# Altium PCB PCB.PcbDoc
Units mil, origin at the board's own origin, x right, y up, seen from the top; angles counter-clockwise.
Board outline 3937.01 x 3937.01 mil, 2 copper layers (Top Layer, Bottom Layer); 92 components, 63 nets, 363 pads, 53 vias.
Unrouted connection lines stored in the file: 291.
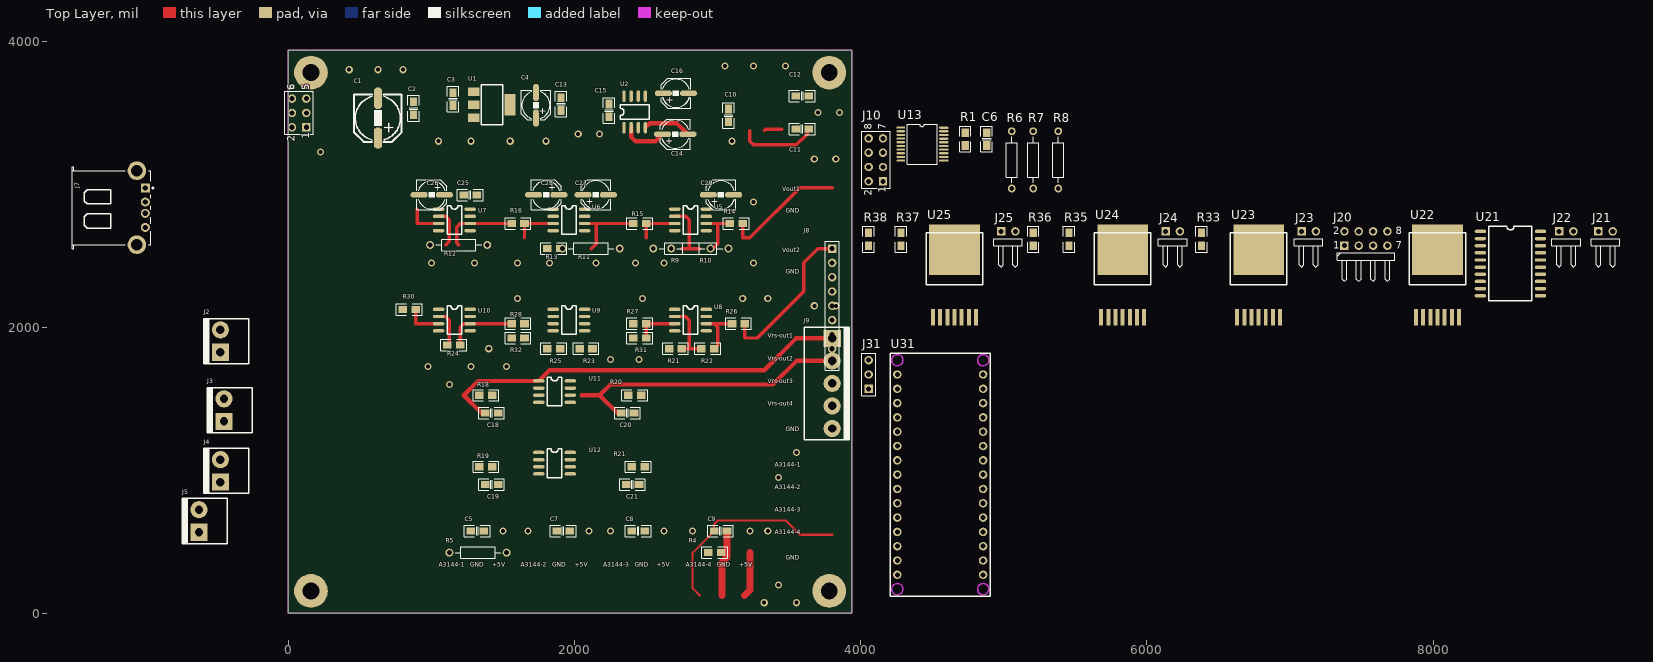
[diagram p0: Top Layer view]
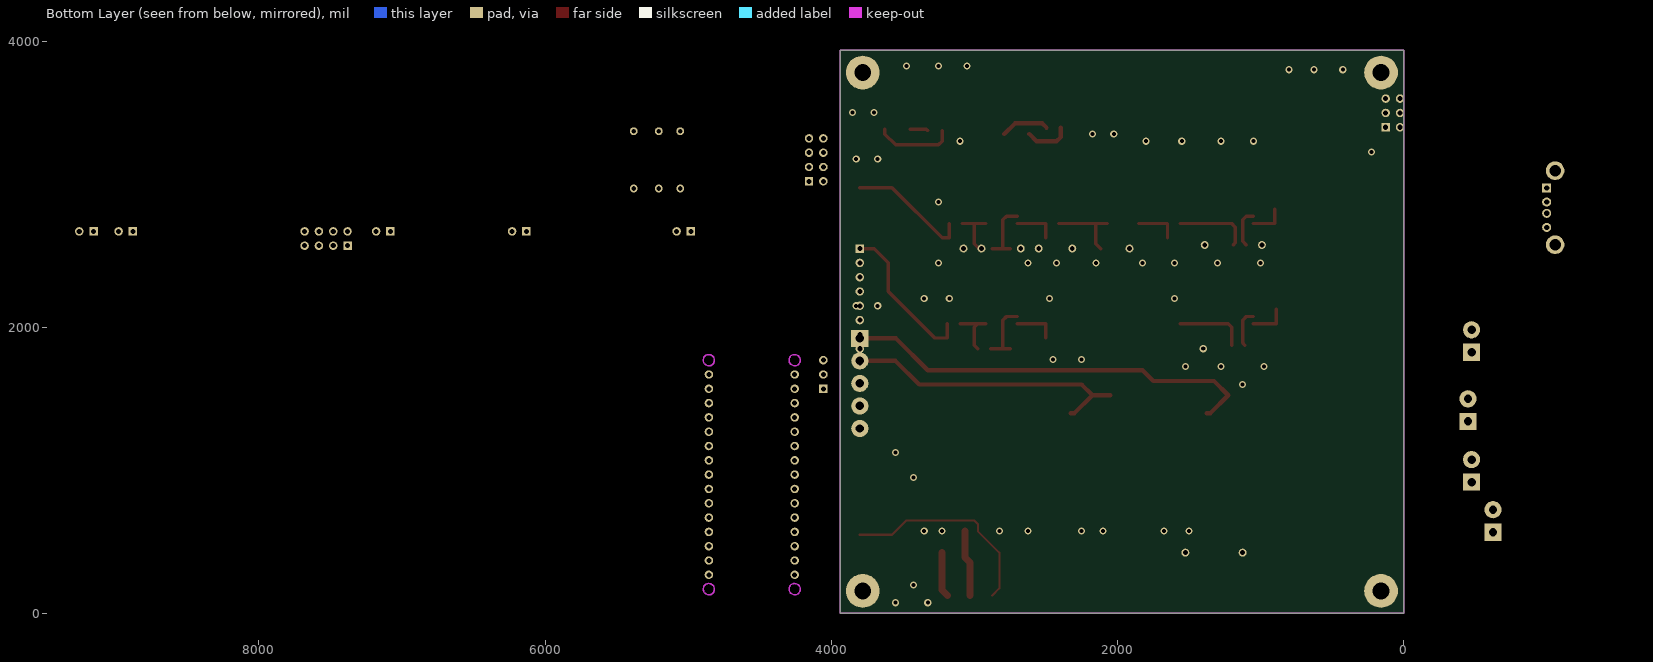
[diagram p1: Bottom Layer view, seen from below]

## Layer stack, top to bottom
Top Solder: solder mask 0.4, Solder Resist, Dk 3.5
Top Layer: signal copper 1.4
Dielectric 1: dielectric 12.6, FR-4, Dk 4.8
Bottom Layer: signal copper 1.4
Bottom Solder: solder mask 0.4, Solder Resist, Dk 3.5

## Board outline
0,0 0,3937.01 3937.01,3937.01 3937.01,0

## Design rules (kind name [scope] priority, off if disabled: settings)
Clearance [All] p1: gap=10
HoleSize [All] p1: absolutevalues=TRUE maxlimit=314.96 minlimit=1 maxpercent=80.000 minpercent=20.000
PlaneConnect [All] p1: planeconnectstyle=Direct reliefexpansion=20 reliefentries=4 reliefconductorwidth=10 reliefairgap=10
PolygonConnect [All] p1: connectstyle=Direct reliefconductorwidth=10 reliefentries=4 polygonreliefangle="90 Angle" airgapwidth=10
RoutingVias [All] p1: holewidth=28 width=50 viastyle="Through Hole" minholewidth=28 minwidth=50 maxholewidth=28 maxwidth=50
SolderMaskExpansion [All] p1: expansion=4
Width [All] p1: maxlimit=100 minlimit=10 preferedwidth=30
28 further rules are at their usual default settings.

## Classes and differential pairs
component class BTS7960: C25 C26 C27 C28 C29 J20 J21 J22 J23 J24 J25 R21 R22 R23 R24 R25 R26 R27 R28 R30 R31 R32 R33 R35 R36 R37 R38 U21 U22 U23 U24 U25
component class "Arduino Nano": J31 U31
component class 电原理图: *? C1 C2 C3 C4 C5 C6 C7 C8 C9 C10 C11 C12 C13 C14 C15 C16 C17 C18 C19 C20 C21 C22 C23 C24 C25 C26 C27 C28 C29 J1 J2 J3 J4 J5 J7 J8 J9 J10 MCP6002 MCP? R1 R4 R5 R6 R7 R8 R9 R10 R11 R12 R13 R14 R15 R16 R17 R18 R19 R20 R21 R22 R23 R24 R25 R27 R28 R29 R30 R31 R32 U1 U2 U3 U4 U5 U6 U7 U8 U9 U10 U11 U12 U13

## Components (designator, comment, footprint, x,y, rotation, side; value= is the part's Value field where it differs from the comment)
C1 "CD-25V-220uF-F8(SMD)" SMD-EC-F8 625,3322.41 r90 top
C2 "0805-50V-0.1uF" CC0805 875,3485 r90 top
C3 "0805-50V-0.1uF" CC0805 1150,3550 r90 top
C4 "CD-50V-10uF-F5(SMD)" SMD-EC-F5 1730,3453.75 r90 top
C5 "0805-50V-0.1uF" CC0805 1275,575 r0 top
C6 "0805-50V-0.1uF" CC0805 4880,3270 r90 top
C7 "0805-50V-0.1uF" CC0805 1875,575 r0 top
C8 "0805-50V-0.1uF" CC0805 2400,575 r0 top
C9 "0805-50V-0.1uF" CC0805 2975,575 r0 top
C10 "0805-50V-0.1uF" CC0805 3075,3435 r90 top
C11 "0805-50V-0.1uF" CC0805 3635,3385 r180 top
C12 "0805-50V-0.1uF" CC0805 3636.25,3615 r180 top
C13 "0805-50V-0.1uF" CC0805 1905,3605 r270 top
C14 "CD-50V-10uF-F5(SMD)" SMD-EC-F5 2605,3350 r0 top
C15 "0805-50V-0.1uF" CC0805 2240,3470 r90 top
C16 "CD-50V-10uF-F5(SMD)" SMD-EC-F5 2610,3635 r0 top
C18 "0805-50V-47pF" CC0805 1465,1400 r180 top
C19 "0805-50V-47pF" CC0805 1465,900 r180 top
C20 "0805-50V-47pF" CC0805 2325,1400 r0 top
C21 "0805-50V-47pF" CC0805 2360,900 r0 top
C25 "0805-0.1UF" CC0805 1225,2925 r0 top
C26 "50V-100UF" SMD-EC-F5 1100,2925 r180 top
C27 "50V-100UF" SMD-EC-F5 2050,2925 r0 top
C28 "50V-100UF" SMD-EC-F5 1900,2925 r180 top
C29 "50V-100UF" SMD-EC-F5 2925,2925 r0 top
J1 "Header 3X2" HDR2X3 124.98,3397.71 r90 top
J2 "VH3.96-2P" VH3.96-2P -475,1825 r90 top
J3 "VH3.96-2P" VH3.96-2P -450.02,1342.71 r90 top
J4 "VH3.96-2P" VH3.96-2P -475.02,917.71 r90 top
J5 "VH3.96-2P" VH3.96-2P -625.02,567.71 r90 top
J7 "USB TypeB" "USB TypeA 平插" -1056.81,3096.63 r180 top
J8 "Header 9" HDR1X9 3800.02,2549.81 r270 top
J9 "Header 5" VH3.96-5P 3800,1922.44 r270 top
J10 "Header 4X2" HDR2X4 4155,3020 r90 top
J20 "Header 4X2H" HDR2X4H 7380,2570 r0 top
J21 "Header 2H" HDR1X2H 9155,2670 r0 top
J22 "Header 2H" HDR1X2H 8880,2670 r0 top
J23 "Header 2H" HDR1X2H 7080,2670 r0 top
J24 "Header 2H" HDR1X2H 6130,2670 r0 top
J25 "Header 2H" HDR1X2H 4980,2670 r0 top
J31 "Header 3" HDR1X3 4055,1570 r90 top
R1 "Res2" 0805 4730,3270 r90 top
R4 "Res2" 0805 3025,425 r180 top
R5 "Res2" AXIAL-0.4 1325,425 r180 top
R6 "Res2" AXIAL-0.4 5055,3170 r90 top
R7 "Res2" AXIAL-0.4 5205,3170 r90 top
R8 "Res2" AXIAL-0.4 5380,3170 r90 top
R9 "Res2" AXIAL-0.4 2750,2550 r180 top
R10 "Res2" AXIAL-0.4 2875,2550 r0 top
R11 "Res2" AXIAL-0.4 2115,2550 r180 top
R12 "Res2" AXIAL-0.4 1190,2575 r180 top
R13 "Res2" 0805 1900,2550 r180 top
R14 "Res2" 0805 3085,2725 r0 top
R15 "Res2" 0805 2500,2725 r180 top
R16 "Res2" 0805 1650,2725 r180 top
R18 "Res2" 0805 1425,1525 r180 top
R19 "Res2" 0805 1425,1025 r180 top
R20 "Res2" 0805 2375,1525 r0 top
R21 "Res2" 0805 2750,1850 r180 top
R21 "Res2" 0805 2400,1025 r0 top
R22 "Res2" 0805 2885,1850 r0 top
R23 "Res2" 0805 2125,1850 r180 top
R24 "Res2" 0805 1200,1875 r180 top
R25 "Res2" 0805 1900,1850 r180 top
R26 "Res2" 0805 3100,2025 r0 top
R27 "Res2" 0805 2500,2025 r180 top
R28 "Res2" 0805 1650,2025 r180 top
R30 "Res2" 0805 890,2125 r180 top
R31 "Res2" 0805 2500,1925 r180 top
R32 "Res2" 0805 1650,1925 r180 top
R33 "Res2" 0805 6380,2570 r90 top
R35 "Res2" 0805 5455,2570 r90 top
R36 "Res2" 0805 5205,2570 r90 top
R37 "Res2" 0805 4280,2570 r90 top
R38 "Res2" 0805 4055,2570 r90 top
U1 "LM1117-1.5" SOT223 1295,3645 r270 top
U2 "max860" SO-8 2345,3395 r90 top
U5 "A3144" SO-8 2700,2825 r0 top
U6 "A3144" SO-8 1850,2825 r0 top
U7 "A3144" SO-8 1050,2825 r0 top
U8 "A3144" SO-8 2700,2125 r0 top
U9 "A3144" SO-8 1850,2125 r0 top
U10 "A3144" SO-8 1050,2125 r0 top
U11 "MCP6002" SO-8 1750,1625 r0 top
U12 "MCP6002" SO-8 1750,1125 r0 top
U13 "PCA9544" SSOP20 4280,3395 r0 top
U21 "SN74AHC244DW" SOP-20 8330,2670 r0 top
U22 "BTN7970" BTN7970 7880,2070 r0 top
U23 "BTN7970" BTN7970 6630,2070 r0 top
U24 "BTN7970" BTN7970 5680,2070 r0 top
U25 "BTN7970" BTN7970 4505,2070 r0 top
U31 "Arduino Nano BLE" "Arduino Nano" 4255,1670 r0 top

## Footprints (in the part's own frame and the unit in brackets; to place one, negate y for a bottom-side part, rotate by r counter-clockwise, add the part's x,y. Pads: shape width x height; smd on the part's side, far side on the other; paste and mask are expansions set on the pad)
0805 [mil]
  rect 60x50 smd: 1(0,0) 2(90,0)
  silkscreen extent -45,-40 135,40
"Arduino Nano" [mm]
  round 1.5 hole 0.9: 1(0,0) 2(0,-2.54) 3(0,-5.08) 4(0,-7.62) 5(0,-10.16) 6(0,-12.7) 7(0,-15.24) 8(0,-17.78) 9(0,-20.32) 10(0,-22.86) 11(0,-25.4) 12(0,-27.94) 13(0,-30.48) 14(0,-33.02) 15(0,-35.56) 16(15.24,-35.56) 17(15.24,-33.02) 18(15.24,-30.48) 19\(15.24,-27.94) 20(15.24,-25.4) 21(15.24,-22.86) 22(15.24,-20.32) 23(15.24,-17.78) 24(15.24,-15.24) 25(15.24,-12.7) 26(15.24,-10.16) 27(15.24,-7.62) 28(15.24,-5.08) 29(15.24,-2.54) 30(15.24,0)
  Keep-Out Layer circle w0.254: c15.24,2.54 r1
  Keep-Out Layer circle w0.254: c0,2.54 r1
  Keep-Out Layer circle w0.254: c15.24,-38.1 r1
  Keep-Out Layer circle w0.254: c0,-38.1 r1
  silkscreen extent -1.27,-39.37 16.51,3.81
AXIAL-0.4 [mm] "Axial Device, Thru-Hole; 2 Leads; 0.4 in Pin Spacing"
  round 1.4 hole 0.85: 1(-5.08,0) 2(5.08,0)
  silkscreen extent -4.06,-1.02 4.06,1.02
BTN7970 [mm]
  rect 0.7x3 smd: 1(0,0) 2(1.27,0) 3(2.54,0) 4(3.81,0) 5(5.08,0) 6(6.35,0) 7(7.62,0)
  rect 9x9 smd: 8(3.81,12)
  silkscreen extent -1.19,5.75 8.81,15
CC0805 [mil]
  rect 60x50 smd: 1(0,0) 2(90,0)
  silkscreen extent -45,-40 135,40
HDR1X2H [mm] "Connector; Header; 2 Position; Right Angle"
  rect 1.5x1.5 hole 0.9: 1(0,0)
  round 1.5 hole 0.9: 2(2.54,0)
  silkscreen extent -1.27,-6.35 3.81,-1.27
HDR1X3 [mm] "Connector; Header; 3 Position"
  rect 1.5x1.5 hole 0.9: 1(0,0)
  round 1.5 hole 0.9: 2(2.54,0) 3(5.08,0)
  silkscreen extent -1.27,-1.27 6.35,1.27
HDR1X9 [mm] "Connector; Header; 9 Position"
  rect 1.5x1.5 hole 0.9: 1(0,0)
  round 1.5 hole 0.9: 2(2.54,0) 3(5.08,0) 4(7.62,0) 5(10.16,0) 6(12.7,0) 7(15.24,0) 8(17.78,0) 9(20.32,0)
  silkscreen extent -1.27,-1.27 21.59,1.27
HDR2X3 [mm] "Connector; Header; 3x2 Position"
  rect 1.5x1.5 hole 0.9: 1(0,0)
  round 1.5 hole 0.9: 2(0,2.54) 3(2.54,0) 4(2.54,2.54) 5(5.08,0) 6(5.08,2.54)
  silkscreen extent -1.27,-1.27 6.35,3.81
HDR2X4 [mm] "Connector; Header; 4x2 Position"
  rect 1.5x1.5 hole 0.9: 1(0,0)
  round 1.5 hole 0.9: 2(0,2.54) 3(2.54,0) 4(2.54,2.54) 5(5.08,0) 6(5.08,2.54) 7(7.62,0) 8(7.62,2.54)
  silkscreen extent -1.27,-1.27 8.89,3.81
HDR2X4H [mm] "Connector; Header; 4x2 Position; Right Angle"
  rect 1.5x1.5 hole 0.9: 1(0,0)
  round 1.5 hole 0.9: 2(0,2.54) 3(2.54,0) 4(2.54,2.54) 5(5.08,0) 6(5.08,2.54) 7(7.62,0) 8(7.62,2.54)
  silkscreen extent -1.27,-6.35 8.89,-1.27
SMD-EC-F5 [mm]
  oct 3x1 smd: 1(0.254,0) 2(4.731,0)
  silkscreen extent -0.13,-2.66 5.15,2.66
SMD-EC-F8 [mm]
  oct 3.8x1.4 smd: 1(0,0) 2(7.051,0)
  silkscreen extent -0.69,-4.22 7.71,4.22
SO-8 [mil]
  oval 80x24 smd: 1(0,0) 2(0,-50) 3(0,-100) 4(0,-150) 5(220,-150) 6(220,-100) 7(220,-50) 8(220,0)
  silkscreen extent 60,-175 160,25
SOP-20 [mil]
  oval 80x24 smd: 1(0,0) 2(0,-50) 3(0,-100) 4(0,-150) 5(0,-200) 6(0,-250) 7(0,-300) 8(0,-350) 9(0,-400) 10(0,-450) 11(420,-450) 12(420,-400) 13(420,-350) 14(420,-300) 15(420,-250) 16(420,-200) 17(420,-150) 18(420,-100) 19(420,-50) 20(420,0)
  silkscreen extent 60,-485 360,35
SOT223 [mil]
  rect 59x79 smd: 1(0,0) 2(90.55,0) 3(181.1,0)
  rect 150x79 smd: 4(89.88,253.54)
  silkscreen extent -49,52 231,202
SSOP20 [mm]
  rect 1.524x0.381 smd: 1(0,0)
  oval 1.524x0.381 smd: 2(0,-0.65) 3(0,-1.3) 4(0,-1.95) 5(0,-2.6) 6(0,-3.25) 7(0,-3.9) 8(0,-4.55) 9(0,-5.2) 10(0,-5.85)
  oval 1.7x0.4 smd: 11(7.62,-5.85) 12(7.62,-5.2) 13(7.62,-4.55) 14(7.62,-3.9) 15(7.62,-3.25) 16(7.62,-2.6) 17(7.62,-1.95) 18(7.62,-1.3) 19(7.62,-0.65) 20(7.62,0)
  silkscreen extent 1.14,-6.48 6.48,0.64
"USB TypeA 平插" [mm] "USB TypeA 平插"
  rect 1.6x1.6 hole 0.92: 1(-1.443,3.129)
  round 1.6 hole 0.92: 2(-1.443,5.629) 3(-1.443,7.629) 4(-1.443,10.129)
  round 3.3 hole 2: 5(0.057,13.199) 6(0.057,0.059)
  silkscreen extent -2.92,-0.62 11.56,13.88
VH3.96-2P [mil]
  rect 120x120 hole 59.05: 1(-0.19,-0.02)
  round 120 hole 59.05: 2(157.29,-0.02)
  silkscreen extent -79,-197 237,118
VH3.96-5P [mil]
  rect 120x120 hole 59.05: 1(0,0)
  round 120 hole 59.05: 2(157.48,0) 3(314.96,0) 4(472.44,0) 5(629.92,0)
  silkscreen extent -80,-197 709,118

## Part data
C1: library part CAP2, "贴片铝电解电容"
C2 C5 C6 C7 C8 C9 C10 C11 C12 C18 C19 C20 C21: library part CAP, "贴片电容"
C3 C13 C15: library part Cap, "贴片电容"
C4 C14 C16: library part "Cap Pol1", "贴片铝电解电容"
C25: library part Cap, "Capacitor"
C26 C27 C28 C29: library part "Cap Pol3", "Polarized Capacitor (Surface Mount)"
J1: "Header, 3-Pin, Dual row"
J2 J3 J4 J5: library part CON2, "接插件"
J7: "USB TypeB 方口"
J8: "Header, 9-Pin"
J9: "Header, 5-Pin"
J10: "Header, 4-Pin, Dual row"
J20: "Header, 4-Pin, Dual row, Right Angle"
J21 J22 J23 J24 J25: "Header, 2-Pin, Right Angle"
J31: "Header, 3-Pin"
R1 R4 R5 R6 R7 R8 R9 R10 R11 R12 R13 R14 R15 R16 R18 R19 R20 R21 R21 R22 R23 R24 R25 R26 R27 R28 R30 R31 R32 R33 R35 R36 R37 R38: "Resistor"
U1: library part 78, "三端稳压器"
U11 U12: library part Component_1

## Free pads (board coordinates)
  round 236.22 hole 118.11: 2(157.48,157.48) 2(157.48,3779.53) 2(3779.53,157.48) 2(3779.53,3779.53)

## Via types
v1: diameter 50, hole 28, Top Layer to Bottom Layer, 53 vias

## Nets (pads, with @x,y where several pads share a name; then routed paths per layer and width w, separated by ;. In a path a pad name is that pad's centre, name@x,y a point inside that pad or via, vN(x,y) a via of type N, cw(c..) or ccw(c..) an arc to the next point about the centre after c; other vN are vias at no path point)
+1.5V: C4.1 C13.2 C15.2 U1.2 U2.7 U2.8
+3.3V: C1.1 C2.1 C3.2 J1.1 J10.1 J10.2 R1.1 R4.1 R5.1 R6.1 R7.1 R8.1 R9.1 R10.1 R11.1 R12.1 R13.1 R14.1 R15.1 R16.1 U1.3 U5.1 U6.1 U7.1 U8.1 U9.1 U10.1 U13.20 U31.2
+5V: J1.2 J1.4 J7.1 U11.8 U12.8 U31.15
-1.5V: C16.2 J2.2 J3.2 J4.2 J5.2 U2.5
AS5600_1_SCL: J10.8 R4.2 U13.6
AS5600_1_SDA: J10.6 R1.2 U13.5
AS5600_2_SCL: J10.7 R14.2 U13.9 | length 870
  Top Layer w24: R14.2 3175,2625 3225,2625 3575.19,2975.19 3799.98,2975.19
AS5600_2_SDA: J10.5 R13.2 U13.8
FORCE_1: U31.7
FORCE_2: U31.6
FORCE_3: U31.5
FORCE_4: U31.4
GND: C1.2 C2.2 C3.1 C4.2 C5.2 C6.2 C7.2 C8.2 C9.2 C10.2 C11.2 C12.2 C13.1 C15.1 C16.1 C25.2 C26.2 C27.2 C28.2 C29.2 J1.3 J1.5 J1.6 J7.4 J8.9 J9.5 J10.3 J10.4 J20.2 J20.4 J21.2 J22.2 J23.2 J24.2 J25.2 J31.3 R21.1@2750,1850 R22.1 R23.1 R24.1 R25.1 R26.1 R27.1 R28.1 R30.1 R31.1 R32.1 R33.1 R35.1 R36.1 R37.1 R38.1 U1.1 U2.1 U2.3 U2.6 U5.2 U6.2 U7.2 U8.2 U9.2 U10.2 U11.3 U11.4 U11.5 U12.3 U12.4 U12.5 U13.1 U13.2 U13.3 U13.10 U21.1 U21.10 U21.19 U22.1 U23.1 U24.1 U25.1 U31.14 | length 1615.5
  Top Layer w24: U7.2 1100,2775 1125,2750 1125,2600 1100,2575 ; U8.2 2775,2075 2800,2050 2800,1850 ; U5.2 2775,2775 2800,2750 2800,2550 ; R21.1@2750,1850 2800,1850 ; 2750,2550 2800,2550 ; 2875,2550 2800,2550 ; R22.1 2800,1850
  Top Layer w50: 3030.91,125 3030.91,355.91 3065,390 C9.2
  other v1: 3325,75 3550,75 3425,200 1500,575 1675,575 2100,575 2250,575 2625,575 2825,575 3225,575 3350,575 3425,950 3550,1125 1125,1600 975,1725 1275,1725 1525,1725 2250,1775 2450,1775 1400,1850 3675,2150 1600,2200 2475,2200 3175,2200 3350,2200 1000,2450 1300,2450 1600,2450 1825,2450 2150,2450 2425,2450 2625,2450 3250,2450 3250,2875 3675,3175 3825,3175 225,3225 1050,3300 1275,3300 1550,3300 1800,3300 3100,3300 2025,3350 2175,3350 3700,3500 3850,3500 425,3800 625,3800 800,3800 3050,3825 3250,3825 3475,3825
IS1: R31.2 U22.6
IS2: R33.2 U23.6
IS3: R36.2 U24.6
IS4: R38.2 U25.6
NetC14_1: C14.1 U2.2 | length 318.1
  Top Layer w30: U2.2 2395,3330 2425,3300 2565,3300 C14.1
NetC14_2: C14.2 U2.4 | length 339.7
  Top Layer w30: U2.4 2525,3425 2716.25,3425 C14.2
NetC26_1: C26.1 C27.1 C28.1 C29.1 J21.1 U22.7 U23.7 U24.7 U25.7
NetJ22_1: J22.1 U22.4 U22.8
NetJ23_1: J23.1 U23.4 U23.8
NetJ24_1: J24.1 U24.4 U24.8
NetJ25_1: J25.1 U25.4 U25.8
NetR30_2: R30.2 U22.5
NetR32_2: R32.2 U23.5
NetR35_2: R35.2 U24.5
NetR37_2: R37.2 U25.5
NetU21_3: U21.3 U25.3
NetU21_5: U21.5 U25.2
NetU21_7: U21.7 U24.3
NetU21_9: U21.9 U24.2
NetU21_12: U21.12 U23.3
NetU21_14: U21.14 U23.2
NetU21_16: U21.16 U22.3
NetU21_18: U21.18 U22.2
NRST1: U31.18
NRST2: U31.13
R1_PWM: J20.5 R21.2@2660,1850 U21.2 U31.26
R2_PWM: J20.6 R23.2 U21.6 U31.27
R3_PWM: J20.7 R25.2 U21.11 U31.28
R4_PWM: J20.8 R27.2 U21.15 U31.29
RXD: J31.1 U31.17
SCL: R16.2 U13.18 U31.9
SDA: R15.2 U13.19 U31.8
SPEED_1: C5.1 J8.1 R5.2 U31.20
SPEED_2: C6.1 J8.2 R6.2 U31.21
SPEED_3: C7.1 J8.3 R7.2 U5.3 U31.22
SPEED_4: C8.1 J8.4 R8.2 U6.3 U31.23
SPEED_5: C9.1 J8.5 R9.2 U7.3 U31.24 | length 1709.6
  Top Layer w15: 2875,125 2825,175 2825,425 C9.1 2975,625 3000,650 3475,650 3575,550 3800,550
  Top Layer w24: 900,2825 900,2725 U7.3
  other v1: 3825,2150
SPEED_6: C10.1 J8.6 R10.2 U8.3 U31.25
SPEED_7: C11.1 J8.7 R11.2 U9.3 U31.11 | length 551.4
  Top Layer w24: 3225,3375 3225,3300 3250,3275 3550,3275 3625,3350 C11.1@3625,3385
SPEED_8: C12.1 J8.8 R12.2 U10.3 U31.10
TXD: J31.2
VCC: C25.1 J20.1 J20.3 R22.2 R24.2 R26.2 R28.2 U21.4 U21.8 U21.13 U21.17 U21.20
VRS-1: C18.1 J2.1 R18.1 U11.2
VRS-2: C20.2 J3.1 R20.2 U11.6
VRS-3: C19.1 J4.1 R19.1 U12.2
VRS-4: C21.2 J5.1 R21.2@2490,1025 U12.6
VRS-OUT1: C18.2 J9.1 R18.2 U11.1 | length 2941.4
  Top Layer w30: C18.2 1350,1400 1225,1525 1325,1625 U11.1 1825,1700 3325,1700 3547.44,1922.44 J9.1
VRS-OUT2: C20.1 J9.2 R20.1 U11.7 | length 2051.2
  Top Layer w30: 2050,1525 2175,1525 ; C20.1 2300,1400 2175,1525 ; J9.2 3550,1764.96 3385.04,1600 2250,1600 2175,1525
VRS-OUT3: C19.2 J9.3 R19.2 U12.1
VRS-OUT4: C21.1 J9.4 R21.1@2400,1025 U12.7
pads on no net: J7.2 J7.3 J7.5 J7.6 U1.4 U5.4 U5.5 U5.6 U5.7 U5.8 U6.4 U6.5 U6.6 U6.7 U6.8 U7.4 U7.5 U7.6 U7.7 U7.8 U8.4 U8.5 U8.6 U8.7 U8.8 U9.4 U9.5 U9.6 U9.7 U9.8 U10.4 U10.5 U10.6 U10.7 U10.8 U13.4 U13.7 U13.11 U13.12 U13.13 U13.14 U13.15 U13.16 U13.17 U31.1 U31.3 U31.12 U31.16 U31.19\ U31.30
copper on no net: | length 5237.9
  Top Layer w24: 890,2125 890,2025 1050,2025 ; 1050,2075 1100,2075 1125,2050 1125,1890 1110,1875 ; 1190,2575 1175,2590 1175,2700 1200,2725 1270,2725 1560,2725 ; 1200,1875 1200,2000 1225,2025 1270,2025 1560,2025 ; 1650,2625 1650,2725 1850,2725 ; 2070,2725 2150,2725 ; 2115,2550 2150,2585 2150,2725 ; 2410,2725 2150,2725 ; 2500,1925 2500,2025 2700,2025 ; 2500,2625 2500,2725 2700,2725 ; 2920,2025 2975,2025 ; 2920,2725 3000,2725 ; 2965,2550 3000,2585 3000,2725 ; 2975,1850 3000,1875 3000,2000 2975,2025 ; 3085,2725 3000,2725 ; 3100,2025 2975,2025 ; 3190,2025 3190,1925 3275,1925 3600,2250 3600,2450 3700,2550 3800,2550 ; 3325,3375 3335,3385 3448.75,3385
  Top Layer w50: 3186.81,125 3225,163.19 3225,425

## Keep-outs
Keep-Out Layer:
  the board outline again, w10

## Silkscreen, mask and mechanical layers (free items; w line width, h text height)
Top Overlay:
  text "Vout1" at 3450,2950 h30
  text "GND" at 3475,2800 h30
  text "Vout2" at 3450.02,2524.81 h30
  text "GND" at 3475.02,2374.81 h30
  text "Vrs-out1" at 3350,1925 h30
  text "Vrs-out2" at 3350,1767.52 h30
  text "Vrs-out3" at 3350,1610.04 h30
  text "Vrs-out4" at 3350,1452.56 h30
  text "GND" at 3475.02,1274.81 h30
  text "A3144-1" at 3400,1025 h30
  text "A3144-2" at 3400,867.52 h30
  text "A3144-3" at 3400,710.04 h30
  text "A3144-4" at 3400,552.56 h30
  text "GND" at 3475.02,374.81 h30
  text "GND" at 1269.09,327.48 h30
  text "+5V" at 1425,327.48 h30
  text "GND" at 1844.09,327.48 h30
  text "+5V" at 2000,327.48 h30
  text "GND" at 2419.09,327.48 h30
  text "+5V" at 2575,327.48 h30
  text "GND" at 2994.09,327.48 h30
  text "+5V" at 3150,327.48 h30
  text "A3144-1" at 1050,325 h30
  text "A3144-2" at 1625,325 h30
  text "A3144-3" at 2200,325 h30
  text "A3144-4" at 2775,325 h30

## Text inside footprints (layer, text, board x,y; h text height)
C1: Top Overlay "+" at 735.93,3347.62 h78.74 r90
C4: Top Overlay "+" at 1799.95,3481.26 h47.24 r90
C14: Top Overlay "+" at 2632.51,3280.05 h47.24
C16: Top Overlay "+" at 2637.51,3565.05 h47.24
C26: Top Overlay "+" at 1072.49,2994.95 h47.24 r180
C27: Top Overlay "+" at 2077.51,2855.05 h47.24
C28: Top Overlay "+" at 1872.49,2994.95 h47.24 r180
C29: Top Overlay "+" at 2952.51,2855.05 h47.24
J1: Top Overlay "6" at 44.98,3657.71 h50 r90; Top Overlay "5" at 144.98,3657.71 h50 r90; Top Overlay "2" at 44.98,3297.71 h50 r90; Top Overlay "1" at 144.98,3317.71 h50 r90
J10: Top Overlay "2" at 4075,2920 h50 r90; Top Overlay "1" at 4175,2940 h50 r90; Top Overlay "7" at 4175,3380 h50 r90; Top Overlay "8" at 4075,3380 h50 r90
J20: Top Overlay "8" at 7740,2650 h50; Top Overlay "7" at 7740,2550 h50; Top Overlay "1" at 7300,2550 h50; Top Overlay "2" at 7300,2650 h50